# Altium PCB ICEBoard.PcbDoc
Units mil, origin at the board's own origin, x right, y up, seen from the top; angles counter-clockwise.
Board outline 4748.03 x 3751.97 mil, 2 copper layers (Top Layer, Bottom Layer); 40 components, 34 nets, 173 pads, 26 vias.
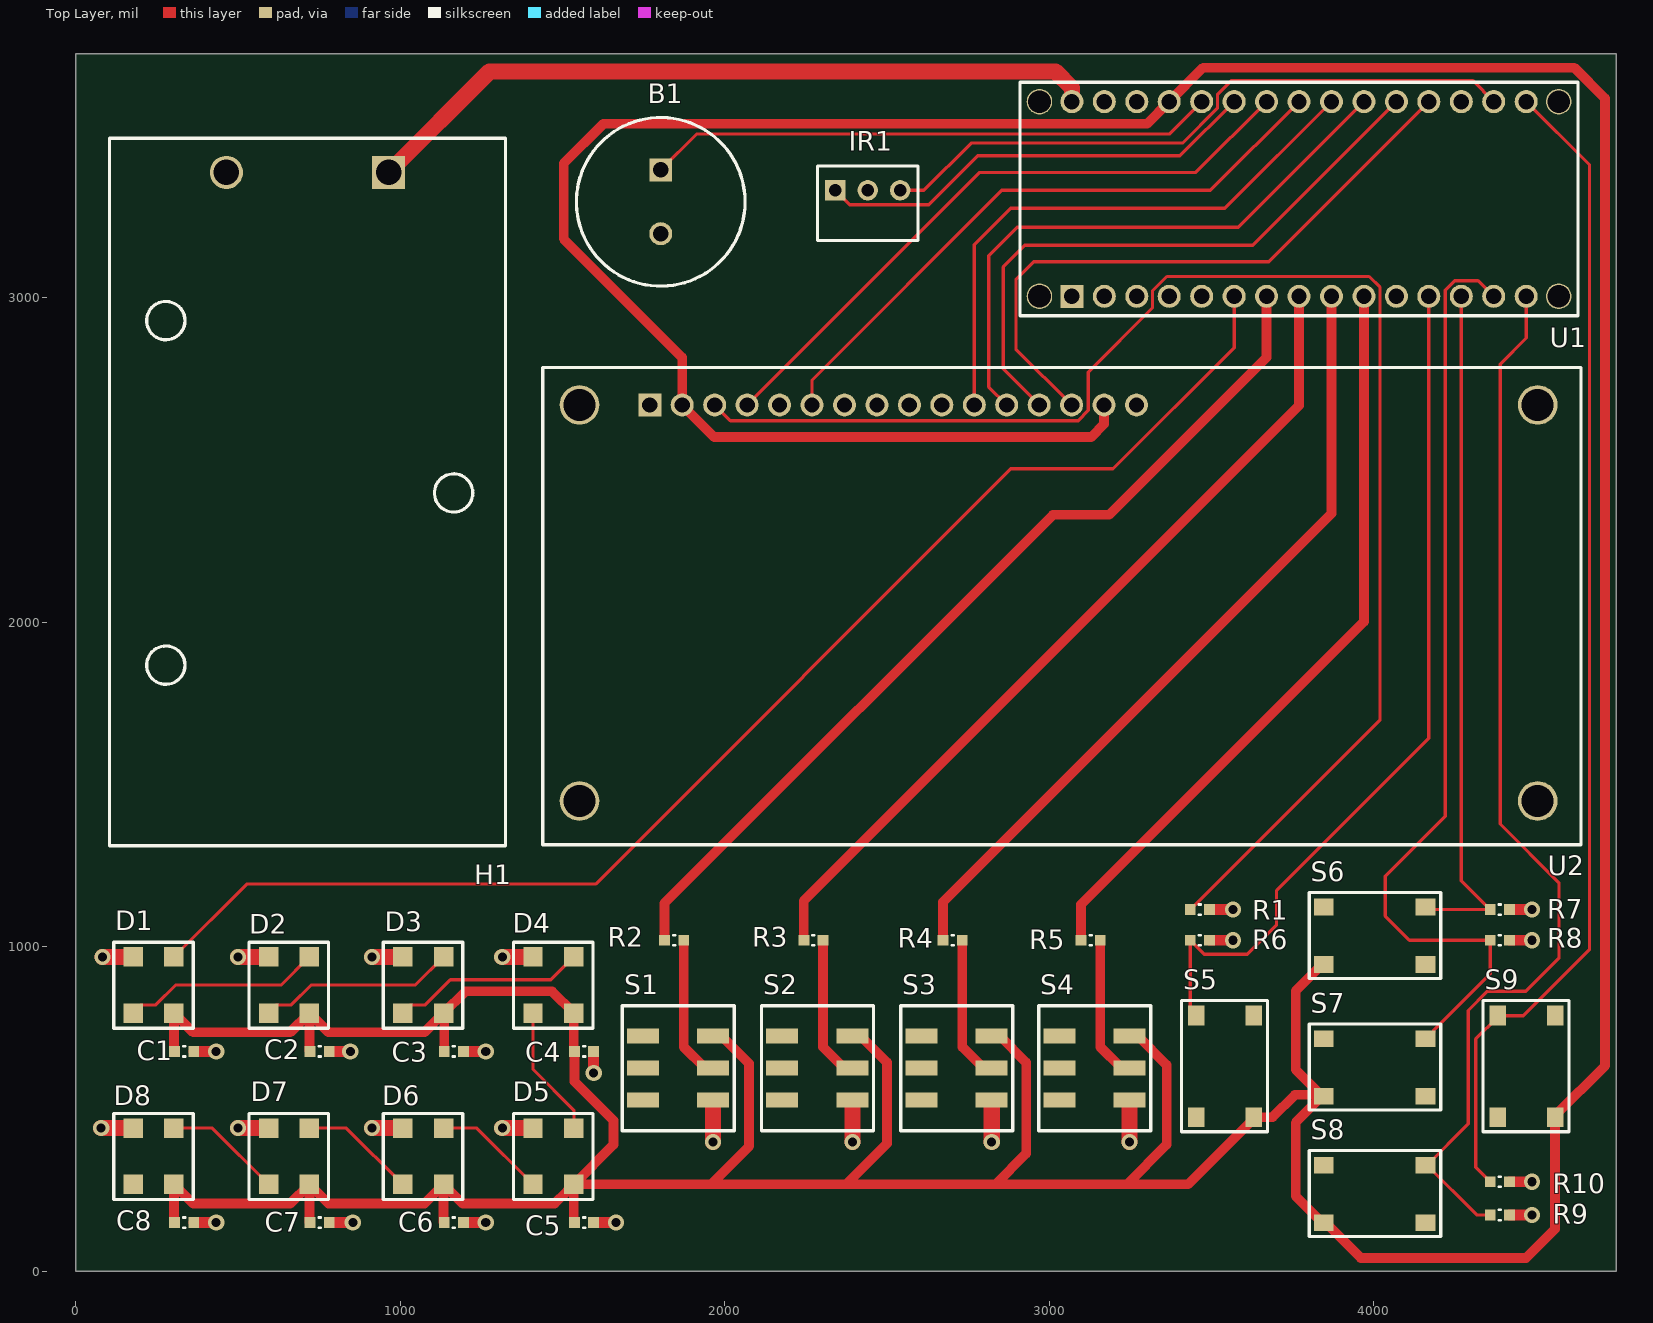
[diagram p0: Top Layer view]
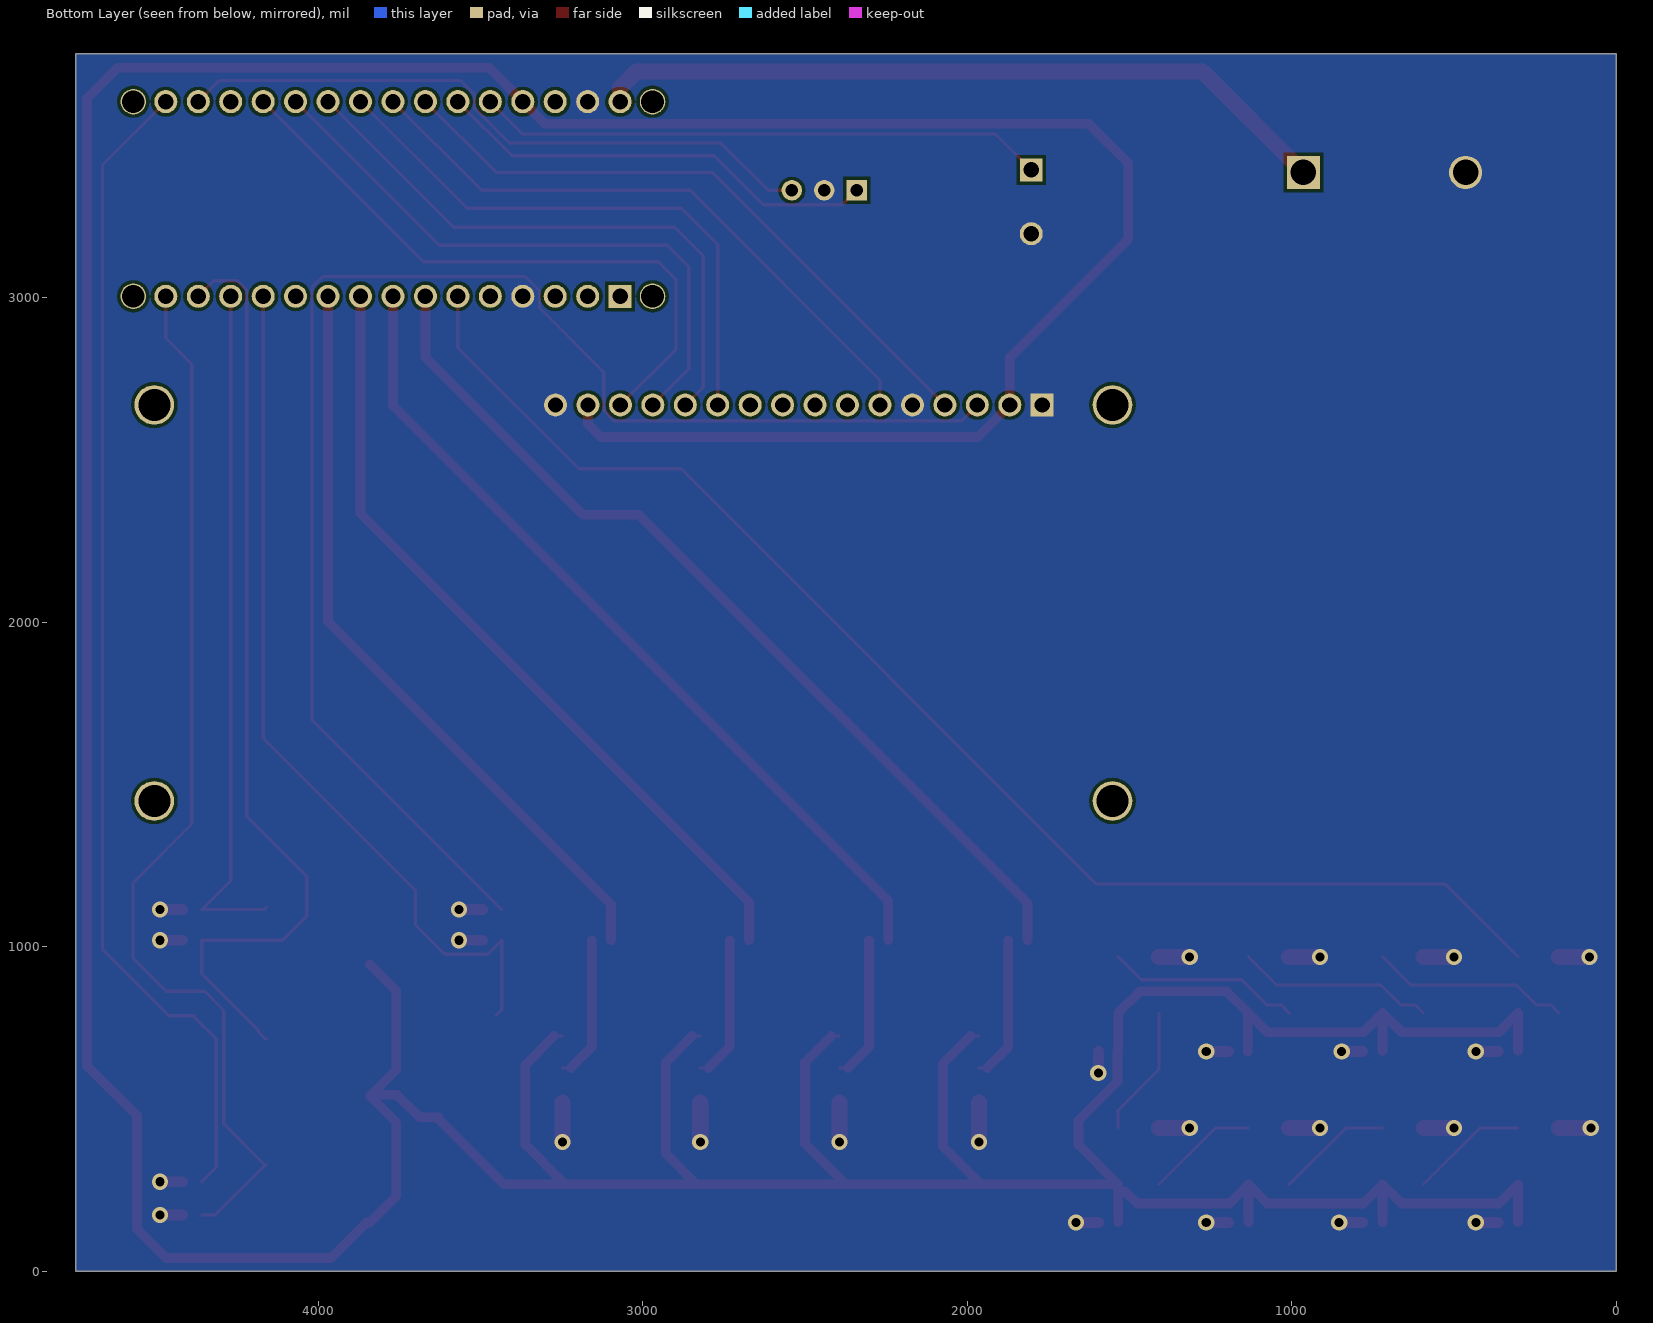
[diagram p1: Bottom Layer view, seen from below]

## Layer stack, top to bottom
Top Solder: solder mask 0.4, Solder Resist, Dk 3.5
Top Layer: signal copper 1.4
Dielectric 1: dielectric 12.6, FR-4, Dk 4.8
Bottom Layer: signal copper 1.4
Bottom Solder: solder mask 0.4, Solder Resist, Dk 3.5

## Board outline
0,0 4748.03,0 4748.03,3751.97 0,3751.97

## Design rules (kind name [scope] priority, off if disabled: settings)
Clearance [All] p1: gap=10 ignorepadtopadclearanceinfootprint=FALSE except(0: Arc-Hole Track-Hole SMDPad-Hole THPad-Hole Via-Hole Fill-Hole Poly-Hole Region-Hole Text-Hole; 8: Arc-THPad Track-THPad)
PolygonConnect [All] p1: connectstyle=Direct reliefconductorwidth=10 reliefentries=4 polygonreliefangle="90 Angle" airgapwidth=10
RoutingVias [All] p1: holewidth=28 width=50 viastyle="Through Hole" minholewidth=28 minwidth=50 maxholewidth=28 maxwidth=50
SolderMaskExpansion [All] p1: expansion=4
UnRoutedNet [All] p1: checkbadconnections=TRUE
Width [All] p1: maxlimit=50 minlimit=10 preferedwidth=10 minimp=50.000000 maximp=50.000000 favimp=50.000000
29 further rules are at their usual default settings.

## Components (designator, comment, footprint, x,y, rotation, side; value= is the part's Value field where it differs from the comment)
B1 "Buzzer" TP124005 1803.15,3393.7 r0 top
C1 "0.1u" Capacitor 334.65,677.17 r0 top
C2 "0.1u" Capacitor 751.97,677.17 r0 top
C3 "0.1u" Capacitor 1165.35,677.17 r0 top
C4 "0.1u" Capacitor 1566.93,677.17 r0 top
C5 "0.1u" Capacitor 1566.93,149.61 r0 top
C6 "0.1u" Capacitor 1165.35,149.61 r0 top
C7 "0.1u" Capacitor 751.97,149.61 r0 top
C8 "0.1u" Capacitor 334.65,149.61 r0 top
D1 "NeoPixel" NEOPIXEL 177.17,968.5 r270 top
D2 "NeoPixel" NEOPIXEL 594.49,968.5 r270 top
D3 "NeoPixel" NEOPIXEL 1007.87,968.5 r270 top
D4 "NeoPixel" NEOPIXEL 1409.45,968.5 r270 top
D5 "NeoPixel" NEOPIXEL 1409.45,440.94 r270 top
D6 "NeoPixel" NEOPIXEL 1007.87,440.94 r270 top
D7 "NeoPixel" NEOPIXEL 594.49,440.94 r270 top
D8 "NeoPixel" NEOPIXEL 177.17,440.94 r270 top
H1 "BH9VPC" BH9VPC 964.57,3385.83 r90 top
IR1 "TSOP382" TSOP382 2340.94,3330.71 r90 top
R1 "10k" Resistor1608 3464.57,1114.17 r180 top
R2 "100" Resistor1608 1844.49,1019.68 r0 top
R3 "100" Resistor1608 2273.62,1019.68 r0 top
R4 "100" Resistor1608 2702.76,1019.68 r0 top
R5 "100" Resistor1608 3127.95,1019.68 r0 top
R6 "10k" Resistor1608 3464.57,1019.68 r180 top
R7 "10k" Resistor1608 4388.78,1114.17 r180 top
R8 "10k" Resistor1608 4388.78,1019.69 r180 top
R9 "10k" Resistor1608 4388.78,173.23 r180 top
R10 "10k" Resistor1608 4388.78,275.59 r180 top
S1 "JS202011SCQN" JS202011SCQN 1964.57,527.56 r90 top
S2 "JS202011SCQN" JS202011SCQN 2393.7,527.56 r90 top
S3 "JS202011SCQN" JS202011SCQN 2822.83,527.56 r90 top
S4 "JS202011SCQN" JS202011SCQN 3248.03,527.56 r90 top
S5 "PTS645" PTS645 3452.76,474.41 r90 top
S6 "PTS645" PTS645 3846.46,1122.05 r0 top
S7 "PTS645" PTS645 3846.46,716.54 r0 top
S8 "PTS645" PTS645 3846.46,326.77 r0 top
S9 "PTS645" PTS645 4381.89,474.41 r90 top
U1 "Arduino Nano" ARDUINONANO 3070.08,3003.94 r0 top
U2 "LCD" TC1602A-01T 1769.29,2669.29 r0 top

## Footprints (in the part's own frame and the unit in brackets; to place one, negate y for a bottom-side part, rotate by r counter-clockwise, add the part's x,y. Pads: shape width x height; smd on the part's side, far side on the other; paste and mask are expansions set on the pad)
ARDUINONANO [mm]
  rect 1.8x1.8 hole 1.2: 1(0,0)
  round 1.8 hole 1.2: 2(2.54,0) 3(5.08,0) 4(7.62,0) 5(10.16,0) 6(12.7,0) 7(15.24,0) 8(17.78,0) 9(20.32,0) 10(22.86,0) 11(25.4,0) 12(27.94,0) 13(30.48,0) 14(33.02,0) 15(35.56,0) 16(35.56,15.24) 17(33.02,15.24) 18(30.48,15.24) 19(27.94,15.24) 20(25.4,15.24) 21(22.86,15.24) 22(20.32,15.24) 23(17.78,15.24) 24(15.24,15.24) 25(12.7,15.24) 26(10.16,15.24) 27(7.62,15.24) 28(5.08,15.24) 29(2.54,15.24) 30(0,15.24)
  round 2 hole 1.778: 31(-2.54,15.24) 32(38.1,15.24) 33(38.1,0) 34(-2.54,0)
  silkscreen extent -4.06,-1.52 39.62,16.76, body extent -3.81,-1.14 41.27,16.45, height 8
BH9VPC [mm]
  rect 2.6x2.6 hole 2: 1(0,0)
  round 2.6 hole 2: 2(0,12.7)
  silkscreen extent -52.7,-9.14 2.67,21.84, body extent -52.12,-8.64 2.22,21.34, height 20.62
Capacitor [mm]
  rect 0.85x0.85 smd: 1(-0.75,0) 2(0.75,0)
  silkscreen extent -0.08,-0.4 0.08,0.4, body extent -0.85,-0.45 0.85,0.45, height 0.9
JS202011SCQN [mm]
  rect 1.2x2.5 smd: 1(0,0) 2(2.5,0) 3(5,0) 4(0,5.5) 5(2.5,5.5) 6(5,5.5)
  silkscreen extent -2.41,-1.65 7.37,7.11, body extent -2,0.95 7,4.55, height 5.5
NEOPIXEL [mil]
  rect 60x60 smd: 1(0,0) 2(0,125.98) 3(173.23,125.98) 4(173.23,0)
  silkscreen extent -45,-60 220,185, body extent -10,-35 185,160, height 63
PTS645 [mm]
  rect 1.55x1.3 smd: 1(0,0) 2(7.95,0) 3(0,-4.5) 4(7.95,-4.5)
  silkscreen extent -1.14,-5.59 9.14,1.14, body extent 0.97,-5.25 6.98,0.75, height 4.3
Resistor1608 [mm]
  rect 0.85x0.85 smd: 1(-0.75,0) 2(0.75,0)
  silkscreen extent -0.08,-0.4 0.08,0.4, body extent -0.8,-0.4 0.8,0.4, height 0.45
TC1602A-01T [mm]
  rect 1.8x1.8 hole 1.2: 1(0,0)
  round 1.8 hole 1.2: 2(2.54,0) 3(5.08,0) 4(7.62,0) 5(10.16,0) 6(12.7,0) 7(15.24,0) 8(17.78,0) 9(20.32,0) 10(22.86,0) 11(25.4,0) 12(27.94,0) 13(30.48,0) 14(33.02,0) 15(35.56,0) 16(38.1,0)
  round 3.1 hole 2.5: 17(-5.5,0) 18(69.5,0) 19(69.5,-31) 20(-5.5,-31)
  silkscreen extent -8.38,-34.42 72.9,2.92, body extent -8,-34 72.5,2.5, height 13.5
TP124005 [mm]
  rect 1.8x1.8 hole 1.2: 1(0,0)
  round 1.8 hole 1.2: 2(0,-5)
  silkscreen extent -6.6,-9.1 6.6,4.1, body extent -6.2,-8.7 6.2,3.7, height 7.3
TSOP382 [mm]
  rect 1.6x1.6 hole 1: 1(0,0)
  round 1.6 hole 1: 2(0,-2.54) 3(0,-5.08)
  silkscreen extent -3.94,-6.48 1.91,1.4, body extent -3.4,-5.04 1.4,-0.04, height 8.55

## Part data
B1: library part TP124005
C1 C2 C3 C4 C5 C6 C7 C8: library part Capacitor
R1 R2 R3 R4 R5 R6 R7 R8 R9 R10: library part Resistor
U1: library part ArduinoNano
U2: library part TC1602A-01T

## Via types
v1: diameter 50, hole 28, Top Layer to Bottom Layer, 26 vias

## Nets (pads, with @x,y where several pads share a name; then routed paths per layer and width w, separated by ;. In a path a pad name is that pad's centre, name@x,y a point inside that pad or via, vN(x,y) a via of type N, cw(c..) or ccw(c..) an arc to the next point about the centre after c; other vN are vias at no path point)
+9: H1.1 U1.30 | length 2297.7
  Top Layer w50: H1.1 1275.59,3696.85 3019.69,3696.85 3070.08,3646.46 U1.30
GND: B1.2 C1.2 C2.2 C3.2 C4.2 C5.2 C6.2 C7.2 C8.2 D1.1 D2.1 D3.1 D4.1 D5.1 D6.1 D7.1 D8.1 H1.2 IR1.2 R1.1 R6.1 R7.1 R8.1 R9.1 R10.1 S1.1 S2.1 S3.1 S4.1 U1.4 U1.29 U2.1 U2.5 U2.16 | length 2245.2
  Top Layer w10: D4.1@1405.51,972.44 D4.1 ; S1.1@1964.57,519.68 S1.1 ; S4.1@3248.03,519.68 S4.1 ; R7.1@4417.32,1115.16 R7.1
  Top Layer w33.46: C8.2 v1(433.07,149.61) ; C1.2 v1(433.07,677.17) ; C7.2 v1(854.33,149.61) ; C2.2 v1(846.46,677.17) ; C6.2 v1(1263.78,149.61) ; C3.2 v1(1263.78,677.17) ; C5.2 v1(1665.35,149.61) ; v1(1596.46,610.24) C4.2 ; R6.1 v1(3566.93,1019.68) ; R1.1 v1(3566.93,1114.17) ; R9.1 v1(4488.19,173.23) ; R10.1 v1(4488.19,275.59) ; R8.1 v1(4488.19,1019.68) ; R7.1 v1(4488.19,1114.17)
  Top Layer w50: v1(78.74,440.94) D8.1 ; v1(82.68,968.5) D1.1 ; v1(500,440.94) D7.1 ; v1(500,968.5) D2.1 ; v1(913.39,440.94) D6.1 ; v1(913.39,968.5) D3.1 ; v1(1314.96,440.94) D5.1 ; v1(1314.96,968.5) D4.1 ; v1(1964.57,397.64) S1.1@1964.57,519.68 ; v1(2393.7,397.64) S2.1@2393.7,519.68 ; v1(2822.83,397.64) S3.1@2822.83,519.68 ; v1(3248.02,397.64) S4.1@3248.02,519.68
NetB1_1: B1.1 U1.26 | length 1754
  Top Layer w10: B1.1 1913.39,3503.94 3370.08,3503.94 U1.26
NetC1_1: C1.1 C2.1 C3.1 C4.1 C5.1 C6.1 C7.1 C8.1 D1.3 D2.3 D3.3 D4.3 D5.3 D6.3 D7.3 D8.3 S1.3 S2.3 S3.3 S4.3 S5.3 S6.3 S7.3 S8.3 S9.3 U1.27 U2.2 U2.15 | length 19874.6
  Top Layer w10: C8.1@303.15,151.57 C8.1 C8.1@309.65,154.13 ; C1.1@303.15,679.13 C1.1 ; C2.1@720.47,679.13 C2.1 ; C6.1@1133.86,151.57 C6.1 ; D3.3 D3.3@1135.83,793.31 ; D5.3@1513.78,246.06 D5.3 ; C5.1@1535.43,151.57 C5.1 ; C4.1@1535.43,679.13 C4.1 ; 1960.63,267.72 1960.63,270.39 ; S1.3 S1.3@1990.16,724.41 ; S2.3 S2.3@2419.29,724.41 ; S3.3 S3.3@2848.43,724.41 ; S4.3 S4.3@3273.62,724.41 ; S5.3@3629.92,469.49 S5.3 ; S7.3@3837.6,543.31 S7.3@3842.52,543.31 ; S8.3@3841.54,149.61 S8.3 S8.3@3851.38,149.61 ; S7.3@3841.54,539.37 S7.3 ; S6.3@3841.54,944.88 S6.3 ; S9.3 S9.3@4559.06,479.33
  Top Layer w30: C8.1@303.15,151.57 D8.3 362.2,208.66 661.42,208.66 D7.3 ; C1.1@303.15,679.13 D1.3 362.2,736.22 661.42,736.22 D2.3 ; C7.1@720.47,151.57 D7.3 ; C2.1@720.47,679.13 D2.3 ; C6.1@1133.86,151.57 D6.3 ; C3.1 D3.3@1135.83,793.31 ; D5.3@1513.78,246.06 1476.38,208.66 1192.91,208.66 D6.3 ; C5.1@1535.43,151.57 D5.3 ; C4.1@1535.43,679.13 D4.3 1468.5,862.2 1200.79,862.2 D3.3 1074.8,736.22 779.53,736.22 D2.3 ; C4.1 1537.4,584.65 1657.48,464.57 1657.48,389.76 D5.3 ; 1960.63,270.39 2074.8,384.57 2074.8,639.76 S1.3@1990.16,724.41 ; S2.3@2419.29,724.41 2500,643.7 2500,393.7 2374.02,267.72 ; S3.3@2848.43,724.41 2929.13,643.7 2929.13,362.2 2834.65,267.72 ; U2.15 3169.29,2610.24 3129.92,2570.87 1967.72,2570.87 U2.2 1869.29,2815.75 1503.94,3181.1 1503.94,3413.39 1625.98,3535.43 3301.57,3535.43 U1.27 3474.8,3708.66 4618.11,3708.66 4712.6,3614.17 4712.6,632.87 S9.3@4559.06,479.33 ; S4.3@3273.62,724.41 3362.2,635.83 3362.2,389.76 3240.16,267.72 ; S5.3@3629.92,469.49 3428.15,267.72 3240.16,267.72 ; S5.3 3688.98,474.41 3757.87,543.31 3837.6,543.31 3759.84,621.06 3759.84,863.19 S6.3@3841.54,944.88 ; S8.3@3841.54,149.61 3759.84,231.3 3759.84,457.68 S7.3@3841.54,539.37 ; S8.3@3851.38,149.61 3960.43,40.55 4469.69,40.55 4559.06,129.92 S9.3 ; D7.3 779.53,208.66 1074.8,208.66 D6.3 ; D5.3 1960.63,267.72 2374.02,267.72 ; 2374.02,267.72 2834.65,267.72 ; 2834.65,267.72 3240.16,267.72
NetD1_2: D1.2 U1.6 | length 4202.7
  Top Layer w10: D1.2 527.56,1192.91 1602.36,1192.91 2881.89,2472.44 3196.85,2472.44 3570.08,2845.67 U1.6
NetD1_4: D1.4 D2.2 | length 615.1
  Top Layer w10: D1.4 202.17,820.28 246.94,820.28 308.55,881.89 633.86,881.89 D2.2
NetD2_4: D2.4 D3.2 | length 611.1
  Top Layer w10: D2.4 619.49,820.28 664.26,820.28 725.87,881.89 1047.24,881.89 D3.2
NetD3_4: D3.4 D4.2 | length 599.3
  Top Layer w10: D3.4 1032.87,820.28 1077.65,820.28 1155.01,897.64 1464.57,897.64 D4.2
NetD4_4: D4.4 D5.2 | length 406.5
  Top Layer w10: D4.4 1409.45,622.05 1535.43,496.06 D5.2
NetD5_4: D5.4 D6.2 | length 347.3
  Top Layer w10: D6.2 1236.22,440.94 D5.4
NetD6_4: D6.4 D7.2 | length 359.2
  Top Layer w10: D7.2 834.65,440.94 D6.4
NetD7_4: D7.4 D8.2 | length 363.1
  Top Layer w10: D8.2 421.26,440.94 D7.4
NetIR1_1: IR1.1 U1.25 | length 1379.2
  Top Layer w10: IR1.1 2385.44,3286.21 2628.73,3286.21 2779.53,3437.01 3403.15,3437.01 U1.25
NetIR1_3: IR1.3 U1.17 | length 2020.4
  Top Layer w10: IR1.3 2614.17,3330.71 2759.84,3476.38 3411.01,3476.38 3518.51,3583.88 3518.51,3624.81 3562.99,3669.29 4304.72,3669.29 U1.17
NetR1_2: R1.2 U2.3 | length 4528
  Top Layer w10: U2.3 2017.72,2620.86 3089.35,2620.86 3120.86,2652.36 3120.86,2770.46 3318.51,2968.12 3318.51,3020.86 3362.8,3065.15 3986.03,3065.15 4019.69,3031.5 4019.69,2985.84 4019.69,1698.82 R1.2
NetR2_1: R2.1 U1.7 | length 2854.1
  Top Layer w30: R2.1 1814.96,1133.86 3011.81,2330.71 3185.04,2330.71 3670.08,2815.75 U1.7
NetR2_2: R2.2 S1.2 | length 446.2
  Top Layer w10: S1.2@1938.98,625.98 S1.2
  Top Layer w30: R2.2 1874.02,717.74 1874.02,690.94 S1.2@1938.98,625.98
NetR3_1: R3.1 U1.8 | length 2616.3
  Top Layer w30: R3.1 2244.09,1141.73 3770.08,2667.72 U1.8
NetR3_2: R3.2 S2.2 | length 446.2
  Top Layer w10: S2.2@2368.11,625.98 S2.2
  Top Layer w30: R3.2 2303.15,690.94 S2.2@2368.11,625.98
NetR4_1: R4.1 U1.9 | length 2480
  Top Layer w30: R4.1 2673.23,1137.8 3870.08,2334.65 U1.9
NetR4_2: R4.2 S3.2 | length 446.2
  Top Layer w10: S3.2@2797.24,625.98 S3.2
  Top Layer w30: R4.2 2732.28,690.94 S3.2@2797.24,625.98
NetR5_1: R5.1 U1.10 | length 2345.3
  Top Layer w30: R5.1 3098.43,1129.92 3970.08,2001.57 U1.10
NetR5_2: R5.2 S4.2 | length 446.2
  Top Layer w10: S4.2@3222.44,625.98 S4.2
  Top Layer w30: R5.2 3157.48,690.94 S4.2@3222.44,625.98
NetR6_2: R6.2 S5.2 U1.12 | length 2692.2
  Top Layer w10: S5.2 3435.04,805.12 R6.2 3478.35,976.38 3610.24,976.38 3700.79,1066.93 3700.79,1173.23 4170.08,1642.52 U1.12
NetR7_2: R7.2 S6.2 U1.13 | length 2129.8
  Top Layer w10: S6.2 4167.32,1114.17 R7.2 4270.08,1203.35 U1.13
NetR8_2: R8.2 S7.2 U1.14 | length 2930.3
  Top Layer w10: S7.2 4164.37,716.54 4184.96,737.13 4184.96,742.05 4359.25,916.34 R8.2 4110.24,1019.69 4035.64,1094.28 4035.64,1216.74 4220.47,1401.57 4220.47,3022.83 4250.02,3052.37 4321.65,3052.37 U1.14
NetR9_2: R9.2 S8.2 U1.15 | length 3286.4
  Top Layer w10: S8.2 S8.2@4164.37,326.77 ; R9.2 4317.91,173.23 S8.2@4164.37,326.77 ; U1.15 4470.08,2875.59 4389.76,2795.28 4389.76,1377.95 4570.87,1196.85 4570.87,964.57 4468.5,862.2 4350.39,862.2 4291.34,803.15 4291.34,453.74 S8.2@4164.37,326.77
NetR10_2: R10.2 S9.2 U1.16 | length 3618.8
  Top Layer w10: R10.2 4314.96,319.88 4314.96,715.55 4381.89,782.48 S9.2 4460.63,787.4 4665.35,992.13 4665.35,3408.66 U1.16
NetU1_19: U1.19 U2.14 | length 1956.7
  Top Layer w10: U2.14 2897.64,2840.95 2897.64,3055.12 2952.76,3110.24 3676.38,3110.24 U1.19
NetU1_20: U1.20 U2.13 | length 1894
  Top Layer w10: U2.13 2858.27,2780.32 2858.27,3094.49 2925.2,3161.42 3627.56,3161.42 U1.20
NetU1_21: U1.21 U2.12 | length 1835.2
  Top Layer w10: U2.12 2814.17,2724.41 2814.17,3129.13 2901.57,3216.54 3582.68,3216.54 U1.21
NetU1_22: U1.22 U2.11 | length 1777.1
  Top Layer w10: U2.11 2769.29,3162.99 2881.89,3275.59 3541.73,3275.59 U1.22
NetU1_23: U1.23 U2.6 | length 1932.7
  Top Layer w10: U2.6 2269.29,2745.67 2854.33,3330.71 3496.85,3330.71 U1.23
NetU1_24: U1.24 U2.4 | length 1987.9
  Top Layer w10: U2.4 2785.83,3385.83 3451.97,3385.83 U1.24
pads on no net: D8.4 S1.4 S1.5 S1.6 S2.4 S2.5 S2.6 S3.4 S3.5 S3.6 S4.4 S4.5 S4.6 S5.1 S5.4 S6.1 S6.4 S7.1 S7.4 S8.1 S8.4 S9.1 S9.4 U1.1 U1.2 U1.3 U1.5 U1.11 U1.18 U1.28 U1.31 U1.32 U1.33 U1.34 U2.7 U2.8 U2.9 U2.10 U2.17 U2.18 U2.19 U2.20

## Polygon pours and split planes (outlines as drawn)
GND on Bottom Layer "Bottom Layer-GND" (solid, pour order 0): 0,3751.97 -0.02,0 4748.03,0 4748.03,3751.97

## Silkscreen, mask and mechanical layers (free items; w line width, h text height)
Mechanical 4 (Mech4):
  lines w10: 0,0 4750,0 4750,3750 0,3750 0,0